# Altium PCB Hecquyn_PCB_Proto1_210523.PcbDoc
Units mil, origin at the board's own origin, x right, y up, seen from the top; angles counter-clockwise.
Board outline 1694 x 2355.81 mil, 2 copper layers (Top Layer, Bottom Layer); 39 components, 61 nets, 182 pads, 35 vias.
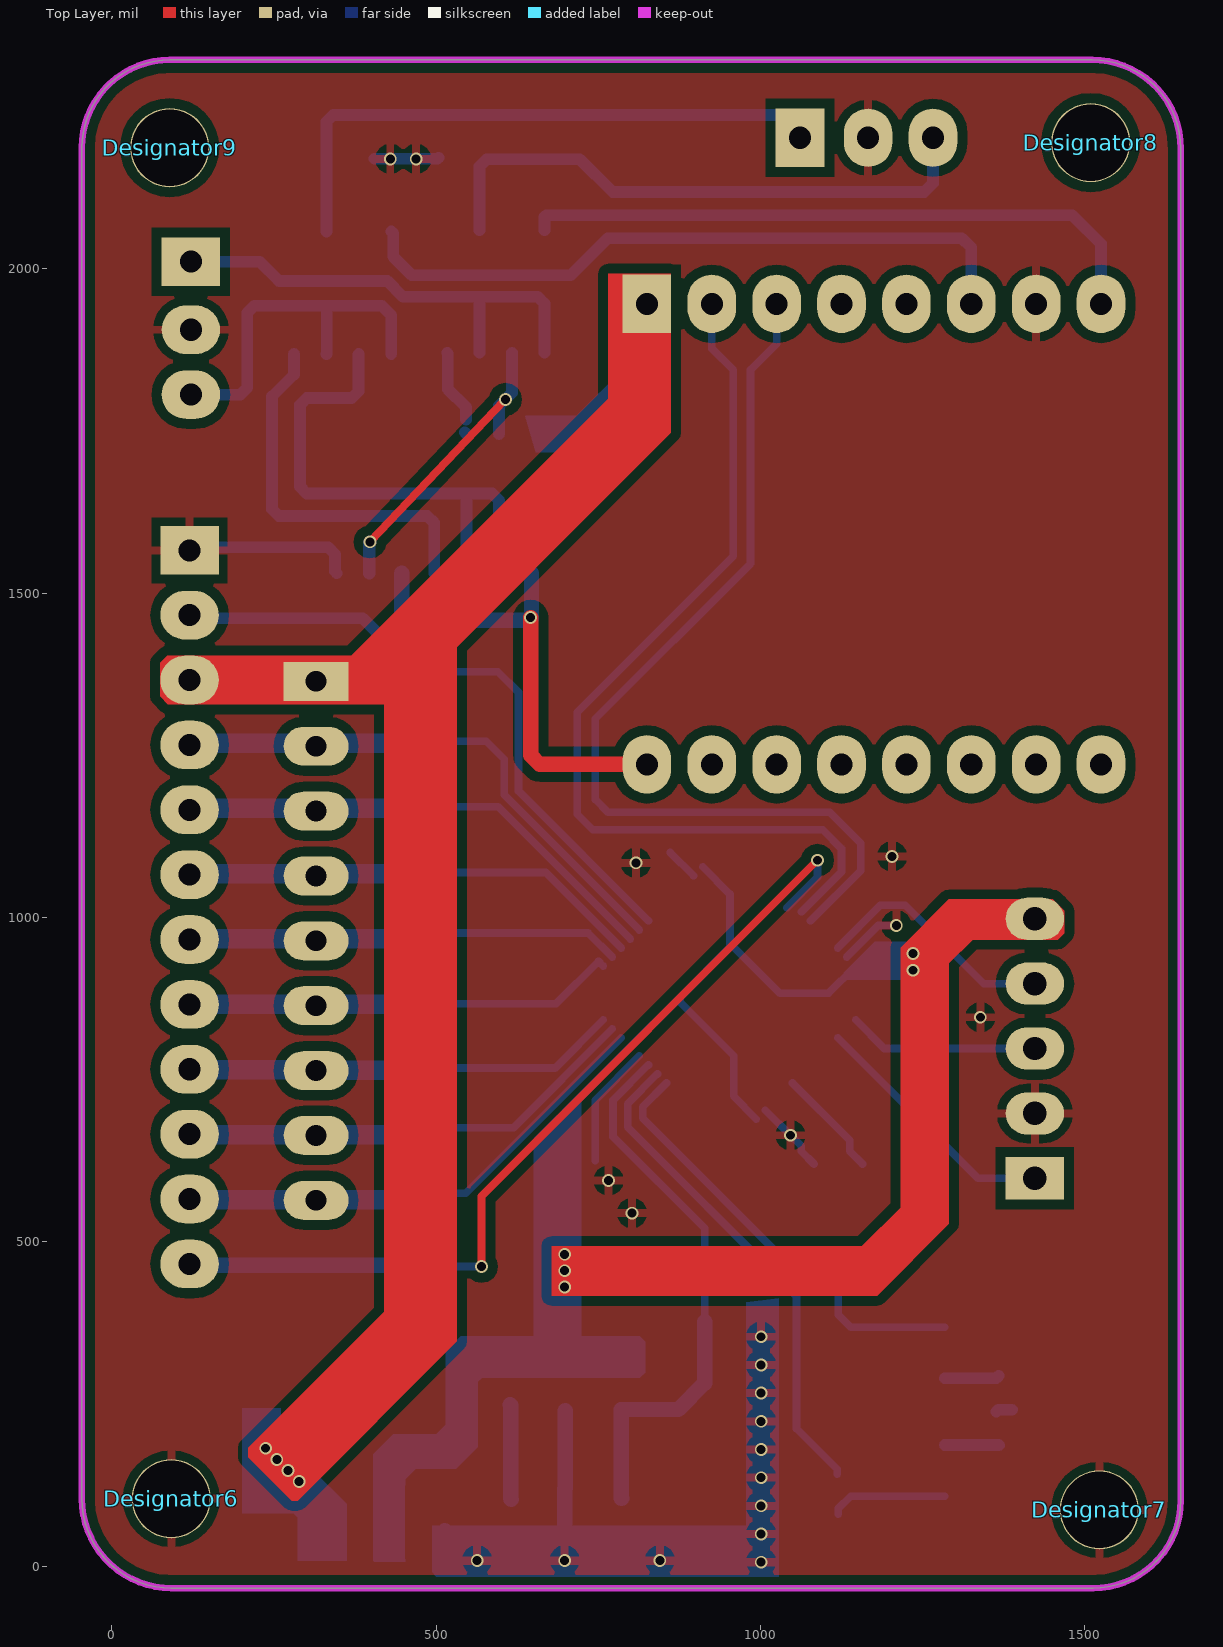
[diagram p0: Top Layer view]
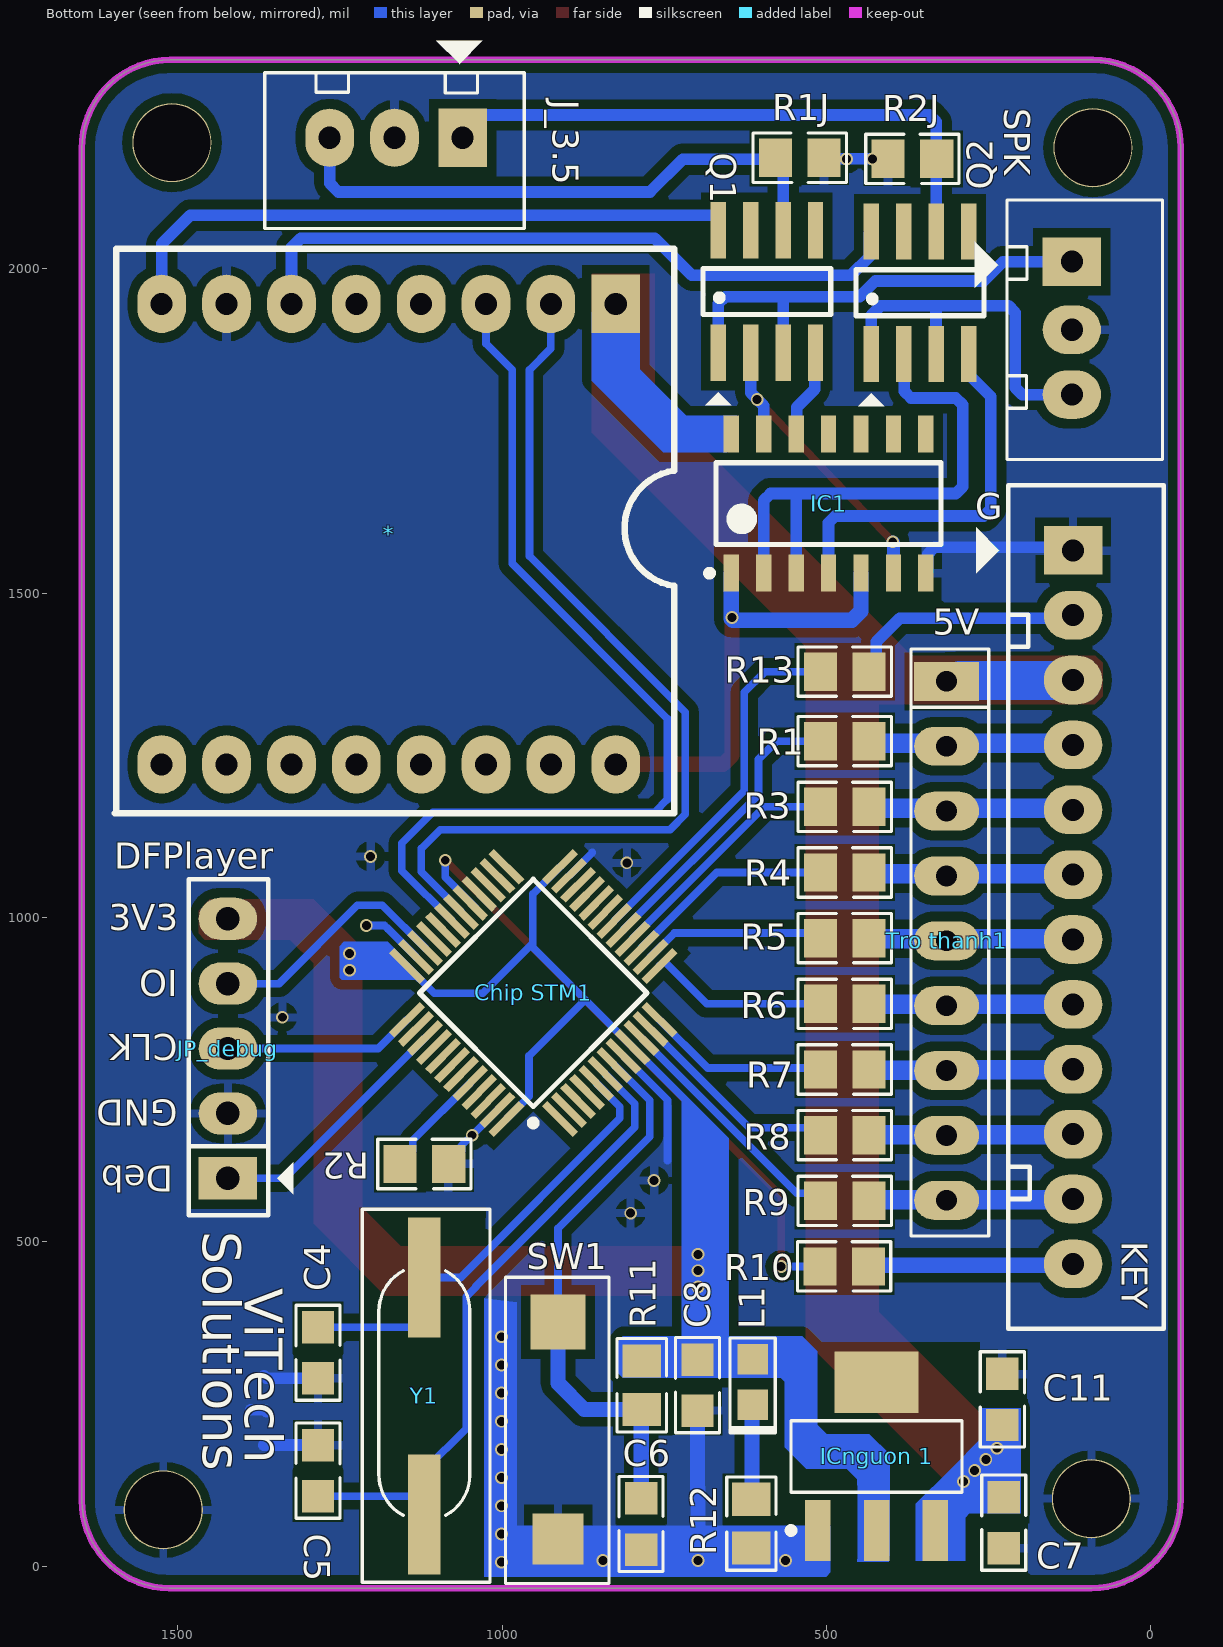
[diagram p1: Bottom Layer view, seen from below]
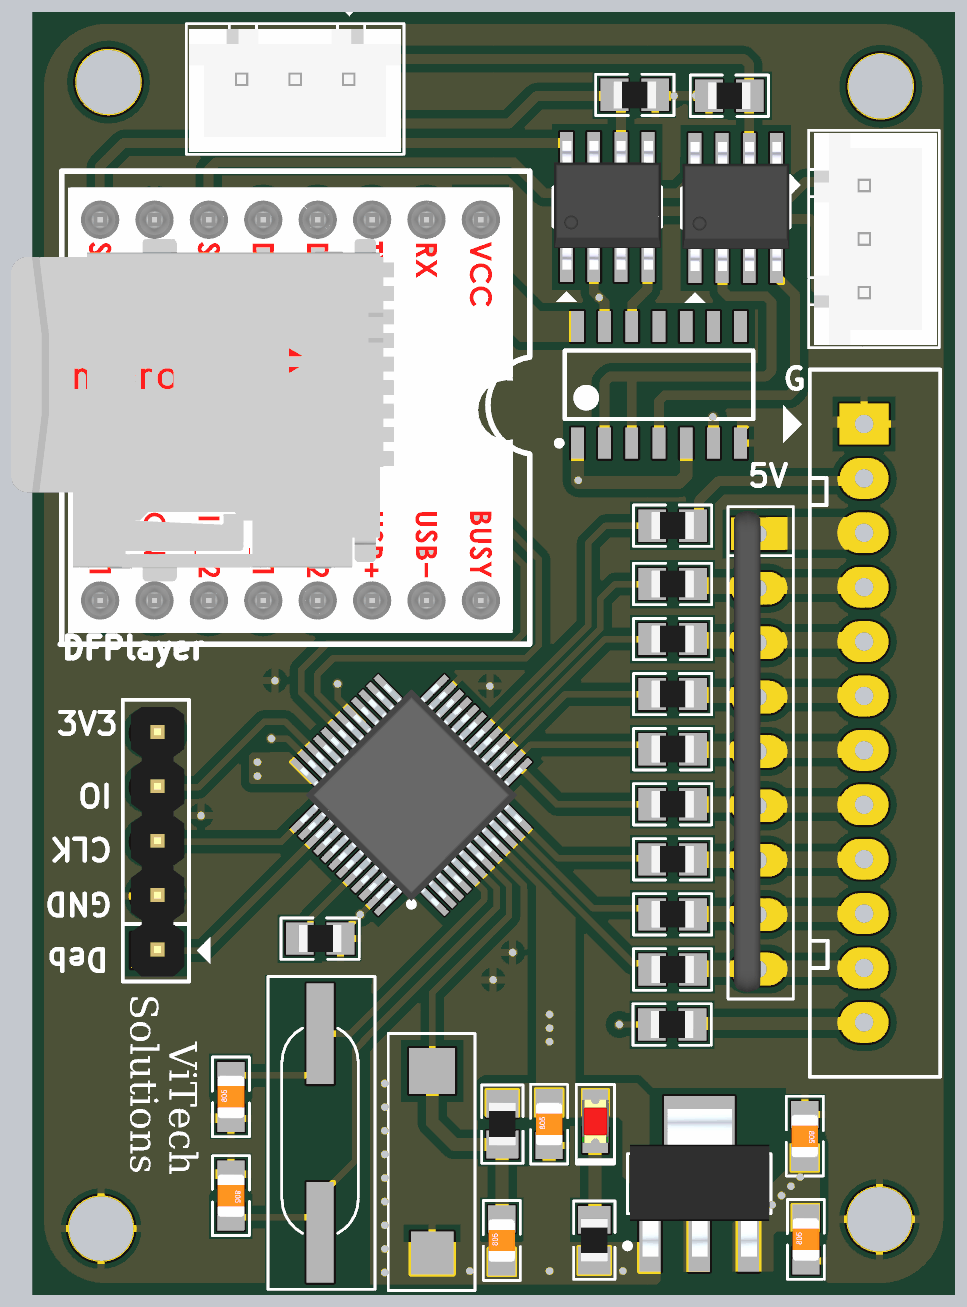
[diagram p2: 3D render of the assembled board from below, using the file's embedded part models]

## Layer stack, top to bottom
Top Solder: solder mask 0.4, Solder Resist, Dk 3.5
Top Layer: signal copper 1.4
Dielectric 1: dielectric 12.6, FR-4, Dk 4.8
Bottom Layer: signal copper 1.4
Bottom Solder: solder mask 0.4, Solder Resist, Dk 3.5

## Board outline
-46,2186.47 -46,103.8 ccw(c91.8,103.8) 91.8,-34 1513.06,-34 ccw(c1513.06,100.94) 1648,100.95 1648,2185.39 ccw(c1511.58,2185.39) 1511.58,2321.81 89.34,2321.81 ccw(c89.34,2186.47)

## Design rules (kind name [scope] priority, off if disabled: settings)
Clearance [All] p1: gap=15
PolygonConnect [All] p1: connectstyle=Relief reliefconductorwidth=13 reliefentries=4 polygonreliefangle="90 Angle" airgapwidth=13
PolygonConnect GND_TOP [IsNamedPolygon('GND_L02_P000') vs IsVia] p2: connectstyle=Direct reliefconductorwidth=10 reliefentries=4 polygonreliefangle="90 Angle" airgapwidth=10
PolygonConnect GND_BOT [IsNamedPolygon('GND_L02_P000') vs IsVia] p3: connectstyle=Direct reliefconductorwidth=10 reliefentries=4 polygonreliefangle="90 Angle" airgapwidth=10
RoutingVias [All] p1: holewidth=13.78 width=19.68 viastyle="Through Hole" minholewidth=13.78 minwidth=19.68 maxholewidth=13.78 maxwidth=19.68
SolderMaskExpansion [All] p1: expansion=4
Width [All] p1: maxlimit=30 minlimit=11.81 preferedwidth=18
30 further rules are at their usual default settings.

## Classes and differential pairs
component class "Principle Circuit": 45 * C4 C5 C6 C7 C8 C11 Check_card "Chip STM1" IC1 "ICnguon 1" J_3.5 JP_debug KEY L1 Q1 Q2 R1 R1J R2 R2J R3 R4 R5 R6 R7 R8 R9 R10 R11 R12 R13 SPK SW1 "Tro thanh1" Y1

## Components (designator, comment, footprint, x,y, rotation, side; value= is the part's Value field where it differs from the comment)
* "DFPlayer" DFplayer 825,1960.81 r0 bottom locked
C4 "22pF" CAP_0805 1284,328.81 r90 bottom
C5 "22pF" CAP_0805 1284,147.18 r270 bottom
C6 "0.1uF" CAP_0805 786,64.81 r90 bottom
C7 "0.1uF" CAP_0805 227,66.81 r90 bottom
C8 "0.1uF" CAP_0805 699,278.81 r90 bottom
C11 "0.1uF" CAP_0805 229,256.81 r270 bottom
"Chip STM1" "STM32F103C8T6" LQFP-48_19.6_393_58X11_SMD 952.26,883.51 r45 bottom
Designator6 "Comment" VIT 91.8,103.8 r0 top
Designator7 "Comment" VIT 1522.56,86.53 r0 top
Designator8 "Comment" VIT 1509.12,2194.35 r0 top
Designator9 "Comment" VIT 89.34,2186.47 r0 top
IC1 "7404" 74C04D 497,1637.81 r90 bottom
"ICnguon 1" "LM1117" SOT223-4N 423,168.97 r90 bottom
J_3.5 "JP3" CON3 1066,2201.81 r0 bottom (schematic designator Jack3.5)
JP_debug "JP5" JP5 1423,597.81 r90 bottom
KEY "JP12" CON12 120,1565.81 r270 bottom (schematic designator JP1)
L1 "RED LED" LED_0805 614,283.81 r90 bottom (schematic designator LED1)
Q1 "APM9926" SO-8 592,1964.81 r90 bottom
Q2 "APM9926" SO-8 356,1962.81 r90 bottom
R1 "1K" RES_0805 472,1271.59 r0 bottom
R1J "100Ohm" RES_0805 541.35,2170.96 r180 bottom (schematic designator R1_Jack)
R2 "10Kohm" RES_0805 1120,619.81 r0 bottom
R2J "100Ohm" RES_0805 367.72,2169.21 r0 bottom (schematic designator R2_Jack)
R3 "1K" RES_0805 472,1170.37 r0 bottom
R4 "1K" RES_0805 472,1069.14 r0 bottom
R5 "1K" RES_0805 472,967.92 r0 bottom
R6 "1K" RES_0805 472,866.7 r0 bottom
R7 "1K" RES_0805 472,765.48 r0 bottom
R8 "1K" RES_0805 472,664.25 r0 bottom
R9 "1K" RES_0805 472,563.03 r0 bottom
R10 "1K" RES_0805 473,461.81 r0 bottom
R11 "10Kohm" RES_0805 785,278.81 r270 bottom
R12 "1K" RES_0805 616,65.45 r270 bottom
R13 "1K" RES_0805 472,1378.81 r0 bottom
SPK "" CON3 122,2005.81 r270 bottom (schematic designator Output)
SW1 "TACT SWITCH" SW_342_SMD 914,41.81 r270 bottom
"Tro thanh1" "10K" RN8 315,1363.81 r270 bottom
Y1 "8MHz" XTAL_314_240X47_SMD 1120,420.81 r270 bottom

## Footprints (in the part's own frame and the unit in brackets; to place one, negate y for a bottom-side part, rotate by r counter-clockwise, add the part's x,y. Pads: shape width x height; smd on the part's side, far side on the other; paste and mask are expansions set on the pad)
74C04D [mm] "SOP, 14-Leads, Body 8.65x3.90mm, Pitch 1.27mm, IPC Medium Density"
  rect 1.45x0.6 smd: 1(-2.725,3.81) 2(-2.725,2.54) 3(-2.725,1.27) 4(-2.725,0) 5(-2.725,-1.27) 6(-2.725,-2.54) 7(-2.725,-3.81) 8(2.725,-3.81) 9(2.725,-2.54) 10(2.725,-1.27) 11(2.725,0) 12(2.725,1.27) 13(2.725,2.54) 14(2.725,3.81)
  silkscreen extent -2.85,-4.4 1.6,4.79, body extent -2,-4.4 2,4.4, height 1.75
CAP_0805 [mil] "Ceramic Capacitor"
  rect 50x50 smd mask+3: 1(-39.37,0) 2(39.37,0)
  silkscreen extent -73,-34 73,34, body extent -39,-25 39,25, height 31
CON3 [mil] "CON 3"
  rect 75x90 hole 34: 1(-5,0)
  oval 75x90 hole 34: 2(100,0) 3(200,0)
  silkscreen extent -100,-150 300,140, body extent -95,-90 295,136, height 276
CON12 [mil] "CON12"
  rect 75x90 hole 34: 1(0,0)
  oval 75x90 hole 34: 2(100,0) 3(200,0) 4(300,0) 5(400,0) 6(500,0) 7(600,0) 8(700,0) 9(800,0) 10(900,0) 11(1000,0) 12(1100,0)
  silkscreen extent -100,-150 1200,140
DFplayer [mil]
  rect 75x90 hole 34: 1(0,15)
  oval 75x90 hole 34: 2(100,15) 3(200,15) 4(300,15) 5(400,15) 6(500,15) 7(600,15) 8(700,15) 9(700,725) 10(600,725) 11(500,725) 12(400,725) 13(300,725) 14(200,725) 15(100,725) 16(0,725)
  silkscreen extent -90,-70 773,800, body extent -60,-40 864,779, height 164
JP5 [mil] "JP5"
  rect 65x90 hole 36: 1(0,0)
  oval 65x90 hole 36: 2(100,0) 3(200,0) 4(300,0) 5(400,0)
  silkscreen extent -57,-101 461,60, body extent -48,-53 448,45, height 323
LED_0805 [mm] "LED"
  rect 1.2x1.2 smd mask+0.076: A(0.889,0) K(-0.889,0)
  silkscreen extent -1.99,-0.89 1.73,0.89, body extent -1.01,-0.62 1.01,0.63, height 1.1
LQFP-48_19.6_393_58X11_SMD [mm] "48LQFP"
  rect 1.7x0.3 smd mask+0.076: 1(-4.238,2.75) 2(-4.238,2.25) 3(-4.238,1.75) 4(-4.238,1.25) 5(-4.238,0.75) 6(-4.238,0.25) 7(-4.238,-0.25) 8(-4.238,-0.75) 9(-4.238,-1.25) 10(-4.238,-1.75) 11(-4.238,-2.25) 12(-4.238,-2.75) 25(4.238,-2.75) 26(4.238,-2.25) 27(4.238,-1.75) 28(4.238,-1.25) 29(4.238,-0.75) 30(4.238,-0.25) 31(4.238,0.25) 32(4.238,0.75) 33(4.238,1.25) 34(4.238,1.75) 35(4.238,2.25) 36(4.238,2.75)
  rect 0.3x1.7 smd mask+0.076: 13(-2.75,-4.238) 14(-2.25,-4.238) 15(-1.75,-4.238) 16(-1.25,-4.238) 17(-0.75,-4.238) 18(-0.25,-4.238) 19(0.25,-4.238) 20(0.75,-4.238) 21(1.25,-4.238) 22(1.75,-4.238) 23(2.25,-4.238) 24(2.75,-4.238) 37(2.75,4.238) 38(2.25,4.238) 39(1.75,4.238) 40(1.25,4.238) 41(0.75,4.238) 42(0.25,4.238) 43(-0.25,4.238) 44(-0.75,4.238) 45(-1.25,4.238) 46(-1.75,4.238) 47(-2.25,4.238) 48(-2.75,4.238)
  silkscreen extent -3.72,-3.15 3.15,3.72, body extent -4.5,-4.5 4.5,4.5, height 1.7
RES_0805 [mm] "Resister"
  rect 1.3x1.5 smd mask+0.076: 1(0.95,0) 2(-0.95,0)
  silkscreen extent -1.83,-0.97 1.83,0.97, body extent -1,-0.63 1,0.62, height 0.5
RN8 [mil] "R SIP8, 9 Pin"
  rect 60x100 hole 32: 1(0,0)
  oval 60x100 hole 32: 2(100,0) 3(200,0) 4(300,0) 5(400,0) 6(500,0) 7(600,0) 8(700,0) 9(800,0)
  silkscreen extent -50,-55 855,65, body extent -43,-44 843,5, height 259
SO-8 [mm] "8-Pin Small Outline Integrated Circuit 1.27 mm Pitch, IPC Medium Density"
  rect 2.2x0.6 smd: 1(-2.4,1.905) 2(-2.4,0.635) 3(-2.4,-0.635) 4(-2.4,-1.905) 5(2.4,-1.905) 6(2.4,-0.635) 7(2.4,0.635) 8(2.4,1.905)
  silkscreen extent -4.44,-2.5 0.9,2.5, body extent -2.93,-2.51 3.08,2.49, height 1.75
SOT223-4N [mm] "SOT223, 4-Leads, Body 6.5x3.5mm, Pitch 2.3mm, Lead Span 7mm, IPC Medium Density"
  rect 2.4x1 smd: 1(-2.9,2.3) 2(-2.9,0) 3(-2.9,-2.3)
  rect 2.4x3.3 smd: 4(2.9,0)
  silkscreen extent -3.02,-3.35 1.4,3.48, body extent -3.39,-3.27 3.5,3.23, height 1.72
SW_342_SMD [mm] "CASE: SMD"
  rect 2x2 smd: 1(0,0)
  rect 2.15x2.15 smd: 2(-8.5,0)
  silkscreen extent -10.25,-2.06 1.75,2, body extent -7.17,-1.79 -1.17,1.71, height 2.4
VIT [mm] "VIT"
  round 3.1 hole 3: VIT1(0,0)
XTAL_314_240X47_SMD [mil] "CASE: TH"
  rect 185x50 smd: 1(-24,0) 2(341,0)
  silkscreen extent -129,-96 446,101, body extent -118,-90 429,95, height 120

## Part data
*: library part Component_1
C4 C5: library part CAP_22pF-50V-5%-0805, "22pF ±5% 50V Ceramic Capacitor C0G, NP0 0805 (2012 Metric)"
C6 C7 C8 C11: library part CAP_0.1uF-50V-5%-0805, "0.1µF ±5% 50V Ceramic Capacitor X7R 0805 (2012 Metric)"
"Chip STM1": library part "IC-STM32F103C8T6 _1", "ARM® Cortex®-M3 STM32F1 Microcontroller IC 32-Bit 72MHz 64KB (64K x 8) FLASH"
IC1: "Hex Inverter"
"ICnguon 1": "3v3"
J_3.5 SPK: library part Con3, "Connector 3"
JP_debug: library part Con5, "Connector 5"
KEY: library part Con12, "Connector 12"
L1: library part LED-RED_10mA-0805, "Red 621nm LED Indication - Discrete 2V 0805 (2012 Metric)"
Q1 Q2: library part APM4953, "Dual P-Channel Enhancement Mode MOSFET"
R1 R1J R2J R3 R4 R5 R6 R7 R8 R9 R10 R12 R13: library part RES_1K-0.125W-1%-0805, "1 kOhms ±1% 0.125W, 1/8W Chip Resistor 0805 (2012 Metric) Moisture Resistant Thick Film"
R2: library part RES_10K-0.125W-1%-0805, "10 kOhms ±1% 0.125W, 1/8W Chip Resistor 0805 (2012 Metric) Moisture Resistant Thick Film"
R11: library part RES_10MOHM-0.125W-1%-0805, "10 MOhms ±1% 0.125W, 1/8W Chip Resistor 0805 (2012 Metric) Automotive AEC-Q200, High Voltage Thick Film"
SW1: library part SW_KSR223GLFG-SMD, "Tactile Switch SPST-NO Top Actuated Surface Mount"
"Tro thanh1": library part RN8, "Resistor 8 (Thanh)"
Y1: library part XTAL_8MHZ-LFXTAL030234, "Crystals 8MHz 22pF -20C 70C"

## Via types
v1: diameter 19.68, hole 13.78, Top Layer to Bottom Layer, tented both sides, 35 vias

## Nets (pads, with @x,y where several pads share a name; then routed paths per layer and width w, separated by ;. In a path a pad name is that pad's centre, name@x,y a point inside that pad or via, vN(x,y) a via of type N, cw(c..) or ccw(c..) an arc to the next point about the centre after c; other vN are vias at no path point)
3V3: "Chip STM1.9" "Chip STM1.24" "Chip STM1.36" "Chip STM1.48" "ICnguon 1.2" C8.2 JP_debug.5 L1.A R11.2 | length 1303.3
  Top Layer w18: 1276,955.1 1276.73,954.36
  Top Layer w30: 1274.34,953.44 1276,955.1
  Bottom Layer w11.81: 699.45,646.05 699.45,700.29 799.48,800.33 872.31,873.16 876.23,877.07 ; 910.84,1078.05 952.97,1035.92 952.97,959.93 ; 993.69,688.97 958.67,723.99 958.67,786.8 876.23,869.24 876.23,877.07 ; 1146.8,924.93 1104.87,883 1029.89,883 952.97,959.93 ; v1@1235.18,918.64 v1(1235.33,918.5) ; 876.23,877.07 952.97,953.81 952.97,959.93
  Bottom Layer w30: 423,54.8 424,55.8 424,146.24 ; L1.A@605.37,317.81 L1.A@606.37,318.81 ; L1.A@614,317.51 783.7,317.51 R11.2 ; C8.2 C8.2@699.45,318.63
  other v1: 698.22,430.07 698.22,455.27 698.22,480.48 1235.33,944.24
5V: "ICnguon 1.3" "Tro thanh1.1" *.1 C7.2 C11.2 IC1.14 KEY.3 | length 529.8
  Top Layer w18: 315,1363.81 334.88,1363.81 355.88,1384.81 ; 825,1865.08 *.1
  Bottom Layer w30: C7.2 C7.2@228,107.18 ; 228,161.81 C7.2@228,107.18 ; C11.2@228,216.44 C11.2 ; 332.45,54.8 328.13,59.12 328.13,91.19 310.56,108.76 229.58,108.76 C7.2@228,107.18
  Bottom Layer w60: KEY.3 121,1364.81 294,1364.81 295,1363.81 315,1363.81
  other v1: 288.96,130.25 271.74,147.35 254.53,164.45 237.31,181.55
BUSY: *.16 IC1.1 IC1.5 | length 732.9
  Top Layer w23.62: v1@645.96,1462.35 645.96,1249.65 659.8,1235.81 *.16
  Bottom Layer w23.62: IC1.5 447,1471.94 460.84,1458.1 644.79,1458.1 647,1460.31 IC1.1
  other v1: 645.65,1462.35
CHECK_CARD: "Chip STM1.18" R13.1 | length 566.1
  Bottom Layer w11.81: R13.1 595,1378.81 627,1346.81 627,1194.85 827.32,994.53
D_N: "Chip STM1.32"
D_P: "Chip STM1.33"
GND: "Chip STM1.8" "Chip STM1.23" "Chip STM1.35" "Chip STM1.47" "ICnguon 1.1" *.7 C4.1 C5.1 C6.1 C7.1 C8.1 C11.1 Designator6.VIT1 Designator7.VIT1 IC1.7 J_3.5.2 JP_debug.2 KEY.1 R1J.1 R2.2 R2J.1 R12.1 SPK.2 SW1.1 | length 1708.1
  Bottom Layer w11.81: 745.21,625.1 745.21,718.21 813.4,786.41 ; 861.19,1099.86 896.92,1064.13 ; 1007.61,702.89 v1(1046.37,664.13) 1062.92,647.58 1062.92,639.49 R2.2 ; 1132.88,938.85 1176.03,982 1181.59,987.56 v1(1209.52,987.56) ; v1@1199,1094 v1(1203,1094)
  Bottom Layer w18: KEY.1 124.69,1570.5 333.64,1570.5 344.19,1559.96 344.19,1533.34 IC1.7 ; R2J.1 502.19,2169.21 R1J.1 ; 990.55,5.93 991.03,5.93 ; C5.1 1367.28,186.55 1367.8,186.03 ; C4.1 1363.56,289.44 1367.36,293.24 ; 1363.31,237.99 1366.49,241.17 1387.93,241.17
  Bottom Layer w23.62: 513.55,54.8 513.55,27.24 532.11,8.68 v1(563.31,8.68) 568.89,14.26 602.22,14.26 617.76,29.81 680.96,29.81 696.89,13.88 698.28,13.88 698.28,119.71 699,120.43 C8.1 ; v1@699,14.6 775.16,14.6 C6.1 797.57,13.88 844.94,13.88 845.31,14.25 886.44,14.25 SW1.1
  other v1: 1001.15,5.92 698.28,8.68 844.94,8.68 1001.15,49.36 1001.15,92.8 1001.15,136.24 1001.15,179.68 1001.15,223.13 1001.15,266.57 1001.15,310.01 1001.15,353.45 802,544 765.98,594.33 1339,846 808,1084 429.39,2169.21 469.35,2169.21
L_3.5: J_3.5.1 Q2.6 R2J.2 | length 921.7
  Bottom Layer w18: Q2.6 331,2226.3 341.54,2236.84 1032.5,2236.84 1061,2208.34 J_3.5.1
L_DRF: IC1.2 IC1.3 Q2.2 | length 831.3
  Bottom Layer w18: Q2.2 380.39,1867.71 380.39,1811.11 369.85,1800.57 300.85,1800.57 290.31,1790.03 290.31,1663.81 300.85,1653.27 586.45,1653.27 597,1642.73 IC1.2 ; IC1.3 547,1651.69
L_SMP: IC1.4 Q2.4 | length 589.4
  Bottom Layer w18: Q2.4 281,1836.83 247.09,1802.92 247.09,1629.26 257.63,1618.72 486.45,1618.72 497,1608.18 IC1.4
Net*_6: *.6 Q2.8 | length 1059.4
  Bottom Layer w18: Q2.8 433.81,2054.49 433.81,2018.64 462.53,1989.92 707.68,1989.92 764.87,2047.11 1310.57,2047.11 1325,2032.68 *.6
Net*_8: *.8 Q1.8 | length 990.4
  Bottom Layer w18: Q1.8 667,2079.68 669.81,2082.49 1480.9,2082.49 1525,2038.39 *.8
"NetChip STM1_44": "Chip STM1.44" R2.1 | length 169.6
  Bottom Layer w11.81: 1049.36,744.65 1137.72,656.29 1137.72,639.49 R2.1
NetJP1_2: KEY.2 R13.2 | length 370.9
  Bottom Layer w18: KEY.2 124.91,1460.9 387.1,1460.9 423.25,1424.75 423.25,1390.16 R13.2
NetJP1_4: "Tro thanh1.2" KEY.4 R1.2 | length 317
  Bottom Layer w30: KEY.4 122.89,1268.7 431.71,1268.7 R1.2
NetJP1_5: "Tro thanh1.3" KEY.5 R3.2 | length 316.5
  Bottom Layer w30: KEY.5 122.28,1168.09 432.32,1168.09 R3.2
NetJP1_6: "Tro thanh1.4" KEY.6 R4.2 | length 316
  Bottom Layer w30: KEY.6 121.66,1067.47 432.94,1067.47 R4.2
NetJP1_7: "Tro thanh1.5" KEY.7 R5.2 | length 315.5
  Bottom Layer w30: KEY.7 121.05,966.86 433.55,966.86 R5.2
NetJP1_8: "Tro thanh1.6" KEY.8 R6.2 | length 315
  Bottom Layer w30: KEY.8 120.44,866.25 434.16,866.25 R6.2
NetJP1_9: "Tro thanh1.7" KEY.9 R7.2 | length 316.1
  Bottom Layer w30: KEY.9 121,764.81 314,764.81 315,763.81 315.83,764.64 433.77,764.64 R7.2
NetJP1_10: "Tro thanh1.8" KEY.10 R8.2 | length 315.2
  Bottom Layer w30: KEY.10 120.78,665.03 433.82,665.03 R8.2
NetJP1_11: "Tro thanh1.9" KEY.11 R9.2 | length 315.8
  Bottom Layer w30: KEY.11 121.39,564.42 433.21,564.42 R9.2
NetJP1_12: KEY.12 R10.2 | length 317.3
  Bottom Layer w23.62: KEY.12 122,463.81 433.6,463.81 R10.2
NetLED1_K: L1.K R12.2 | length 146.8
  Bottom Layer w23.62: L1.K 615,247.81 615,103.84 R12.2
NetOutput_1: Q1.1 Q1.3 SPK.1 | length 728.1
  Bottom Layer w18: SPK.1 228.06,2010.81 257.78,1981.09 424.69,1981.09 448.86,1956.92 563.93,1956.92 567,1953.85 ; 564.07,1956.78 656.45,1956.78 667,1946.24 Q1.1 ; Q1.3 567,1946.63
NetOutput_3: Q2.1 Q2.3 SPK.3 | length 566.8
  Bottom Layer w18: SPK.3 198.4,1805.81 208.94,1816.35 208.94,1932.03 219.48,1942.57 416.54,1942.57 431,1928.11 Q2.1 ; Q2.3 331.26,1868.58 331.26,1935.83
NRST: "Chip STM1.7" C6.2 R11.1 SW1.2 | length 855.2
  Bottom Layer w11.81: 827.32,772.49 772.73,717.9 772.73,661.95 914,520.68 SW1.2
  Bottom Layer w23.62: C6.2 785.5,104.69 785.5,240.9 R11.1 873.59,241.41 914,281.81 SW1.2
PA0: "Chip STM1.10" R9.1 | length 380.2
  Bottom Layer w11.81: R9.1 520.85,574.47 545.79,574.47 785.56,814.25
PA1: "Chip STM1.11" R8.1 | length 330.1
  Bottom Layer w11.81: R8.1 520.96,675.81 619.29,675.81 771.64,828.17
PA2: "Chip STM1.12" R7.1 | length 280.1
  Bottom Layer w11.81: R7.1 511.74,767.81 683.45,767.81 757.72,842.08
PA3: "Chip STM1.13" R6.1 | length 278.5
  Bottom Layer w11.81: R6.1 684.88,866.7 750.42,932.23 757.72,924.93
PA4: "Chip STM1.14" R5.1 | length 280.8
  Bottom Layer w11.81: R5.1 517.3,975.81 734.69,975.81 771.64,938.85
PA5: "Chip STM1.15" R4.1 | length 324.4
  Bottom Layer w11.81: R4.1 669.2,1069.14 785.56,952.77
PA6: "Chip STM1.16" R3.1 | length 374.4
  Bottom Layer w11.81: R3.1 595.81,1170.36 799.48,966.69
PA7: "Chip STM1.17" R1.1 | length 456.6
  Bottom Layer w11.81: R1.1 577.22,1271.58 605,1243.81 605,1189.01 813.4,980.61
PA8: "Chip STM1.29" R10.1 | length 993
  Top Layer w11.81: v1(570,461.81) 570,570.19 v1(1087.86,1088.05)
  Bottom Layer w11.81: R10.1 v1(570,461.81) ; 1041,1014.81 1087.86,1061.67 v1(1087.86,1088.05)
PA15: "Chip STM1.38"
PB1: "Chip STM1.19"
PB3: "Chip STM1.39" JP_debug.1 | length 393.7
  Bottom Layer w11.81: 1118.96,814.25 1335.4,597.81 JP_debug.1
PB4: "Chip STM1.40"
PB5: "Chip STM1.41"
PB6: "Chip STM1.42"
PB7: "Chip STM1.43"
PB8: "Chip STM1.45"
PB9: "Chip STM1.46"
PB10: "Chip STM1.21"
PB11: "Chip STM1.22"
PB12: "Chip STM1.25"
PB13: "Chip STM1.26"
PB14: "Chip STM1.27"
PB15: "Chip STM1.28"
PC13: "Chip STM1.2"
R_3.5: J_3.5.3 Q1.6 R1J.2 | length 899
  Bottom Layer w18: Q1.6 567,2158.01 577.8,2168.81 721.66,2168.81 772.33,2118.14 1252.54,2118.14 1266,2131.6 J_3.5.3
R_DRF: IC1.6 IC1.13 Q1.2 | length 485.4
  Top Layer w11.81: v1(398.02,1578.89) 605.49,1796.9 v1(607,1798.48)
  Bottom Layer w18: IC1.13 597,1788.48 v1(607,1798.48) 617,1808.48 Q1.2
  Bottom Layer w19.68: IC1.6 397,1577.87 v1(398.02,1578.89)
R_SMP: IC1.12 Q1.4 | length 119.3
  Bottom Layer w18: Q1.4 518.17,1869.15 518.17,1814.19 546.2,1786.16 IC1.12@546.2,1767.08 ; IC1.12@544.19,1747.9 IC1.12
RX: "Chip STM1.31" *.3 | length 1469.1
  Bottom Layer w11.81: *.3 1025,1884.2 984.75,1843.95 984.75,1545.45 745.34,1306.04 745.34,1181.79 765.02,1162.1 1106.84,1162.1 1154.79,1114.15 1154.79,1072.11 1077.2,994.53
SWCLK: "Chip STM1.37" JP_debug.3 | length 294.5
  Bottom Layer w11.81: 1146.8,842.08 1191.07,797.81 JP_debug.3
SWDIO: "Chip STM1.34" JP_debug.4 | length 381.3
  Bottom Layer w11.81: 1118.96,952.77 1184.78,1018.59 1223.37,1018.59 1344.15,897.81 JP_debug.4
TX: "Chip STM1.30" *.2 | length 1452.3
  Bottom Layer w11.81: *.2 925,1876.89 957.94,1843.95 957.94,1556.55 717.78,1316.39 717.78,1158.91 741.4,1135.29 1095.73,1135.29 1125,1106.02 1125,1070.17 1063.28,1008.45
XTALA: "Chip STM1.5" C4.2 Y1.1 | length 702.1
  Bottom Layer w11.81: 855.16,744.65 818.66,708.15 818.66,690.06 1063.91,444.81 Y1.1 1120,387.28 1139.09,368.18 C4.2
XTALB: "Chip STM1.6" C5.2 Y1.2 | length 950.3
  Bottom Layer w11.81: 841.24,758.57 795.53,712.86 795.53,676.36 1040.94,430.94 ; 1040.4,430.4 1055.65,415.15 1055.65,211.65 1118.41,148.9 Y1.2@1118.41,141.47 ; Y1.2 1120,88.72 1139.09,107.81 C5.2
pads on no net: "Chip STM1.1" "Chip STM1.3" "Chip STM1.4" "Chip STM1.20" "ICnguon 1.4" *.4 *.5 *.9 *.10 *.11 *.12 *.13 *.14 *.15 Designator8.VIT1 Designator9.VIT1 IC1.8 IC1.9 IC1.10 IC1.11 Q1.5 Q1.7 Q2.5 Q2.7

## Polygon pours and split planes (outlines as drawn)
GND on Top Layer "GND_L01_P001" (solid, pour order 1): -46.27,2185.26 -46.27,102.59 ccw(c91.53,102.59) 91.53,-35.21 1512.79,-35.21 ccw(c1512.79,99.74) 1647.73,99.74 1647.73,2184.18 ccw(c1511.31,2184.18) 1511.31,2320.6 89.07,2320.6 ccw(c89.07,2185.26)
GND on Bottom Layer "GND_L02_P000" (solid, pour order 0): -44.56,2186.27 -44.55,103.6 ccw(c93.24,103.6) 93.24,-34.2 1514.5,-34.2 ccw(c1514.5,100.75) 1649.45,100.75 1649.44,2185.19 ccw(c1513.02,2185.19) 1513.02,2321.61 90.78,2321.61 ccw(c90.78,2186.27)

## Keep-outs
Keep-Out Layer:
  the board outline again, w10

## Other copper
Top Layer:
  region net 5V: 99.95,1402.56 100.42,1403.03 369.02,1403.03 765.27,1799.28 765.27,1992.13 861.52,1992.13 861.99,1991.66 861.99,1746.83 443.87,1328.71 86.65,1328.71 74.64,1340.72 74.64,1392.1 85.56,1403.03 100.87,1403.03
  region net 5V: 419.83,1292.63 419.83,392.12 210.27,182.56 210.27,167.98 277.72,100.53 286.53,100.53 532.17,346.17 532.17,1438.92 419.83,1372.8
  region net 3V3: 677.93,493.08 1156.37,493.08 1215.99,552.7 1215.99,952.93 1290.59,1027.53 1450.96,1027.53 1468.18,1010.31 1468.18,975.51 1458.51,965.84 1327.4,965.84 1290.59,929.03 1290.59,527.4 1180.01,416.82 677.93,416.82
Bottom Layer:
  region net GND: 1028,412.64 1028,-16.17 978,-16.17 978,44.01 978,406.64
  region net 3V3: 650.53,348.35 650.53,659.36 723.4,732.23 723.4,348.12
  region net 3V3: 402.87,21.74 402.87,171.99 434.09,203.21 499.87,203.21 514.67,218.01 514.67,330.93 537.87,354.13 814,354.13 822.09,346.04 822.09,298.25 814.33,290.49 570.91,290.49 564.5,284.08 564.5,183.37 531.06,149.93 468.61,149.93 452.38,133.7 452.07,114.74 452.07,15.44 452.37,6.74 404.37,6.74 403.17,7.94
  region net 5V: 201.03,243.17 260.46,243.17 260.46,197.82 309.45,148.83 362.36,95.92 362.36,8.07 286.49,8.07 286.49,74.67 279.84,81.32 201.03,81.32
  region net 5V: 637.59,1772.65 638.02,1773.08 716.12,1773.08 788.24,1845.2 788.24,1933.97 788.67,1933.54 862.07,1933.54 862.07,1826.85 751.96,1716.74 653.38,1716.74
  region net 3V3: 1166.23,952.4 1176.26,962.43 1188.99,962.43 1244.03,962.27 1250.54,955.76 1250.54,906.72 1247.79,903.97 1125.84,903.97 1128.58,914.75
  pour cut-out: 263.46,345.39 507.87,345.39 592.12,261.14 592.12,-20.29 263.46,-20.29
  region net GND: 494.08,-9.87 500.38,-16.17 1014.36,-16.17 1021.75,-8.78 1021.75,62.36 494.08,62.36
  pour cut-out: 1027.33,414.41 1027.33,-14.44 1027.73,-14.84 1221.36,-14.84 1221.36,553.11 1024.82,553.11
  pour cut-out: 805.02,886.83 805.02,880.35 957.52,727.85 970.39,727.85 1122.87,880.32 970.62,1032.58 943.8,1032.58 936.07,1040.31

## Silkscreen, mask and mechanical layers (free items; w line width, h text height)
Bottom Overlay:
  text "G" at 271,1613.81 h40
  text "5V" at 336,1435.81 h40
  text "3V3" at 1606.63,979.81 h40
  text "IO" at 1500,918.81 h40 r180
  text "CLK" at 1500,819.81 h40 r180
  text "GND" at 1500,718.81 h40 r180
  text "Deb" at 1507,616.81 h40 r180
  text "Solutions" at 1481,516 h100 r90
  text "ViTech" at 1416,428 h100 r90

## Dimensions
-44.58,2346.23 to 1650.97,2358.24 on Bottom Overlay
1697.07,2321.15 to 1666.73,-26.37 on Top Overlay